# Altium PCB Drone_v1.0.PcbDoc
Units mm, origin at the board's own origin, x right, y up, seen from the top; angles counter-clockwise.
Board outline 99.06 x 99.27 mm, 2 copper layers (Top Layer, Bottom Layer); 78 components, 53 nets, 263 pads, 69 vias.
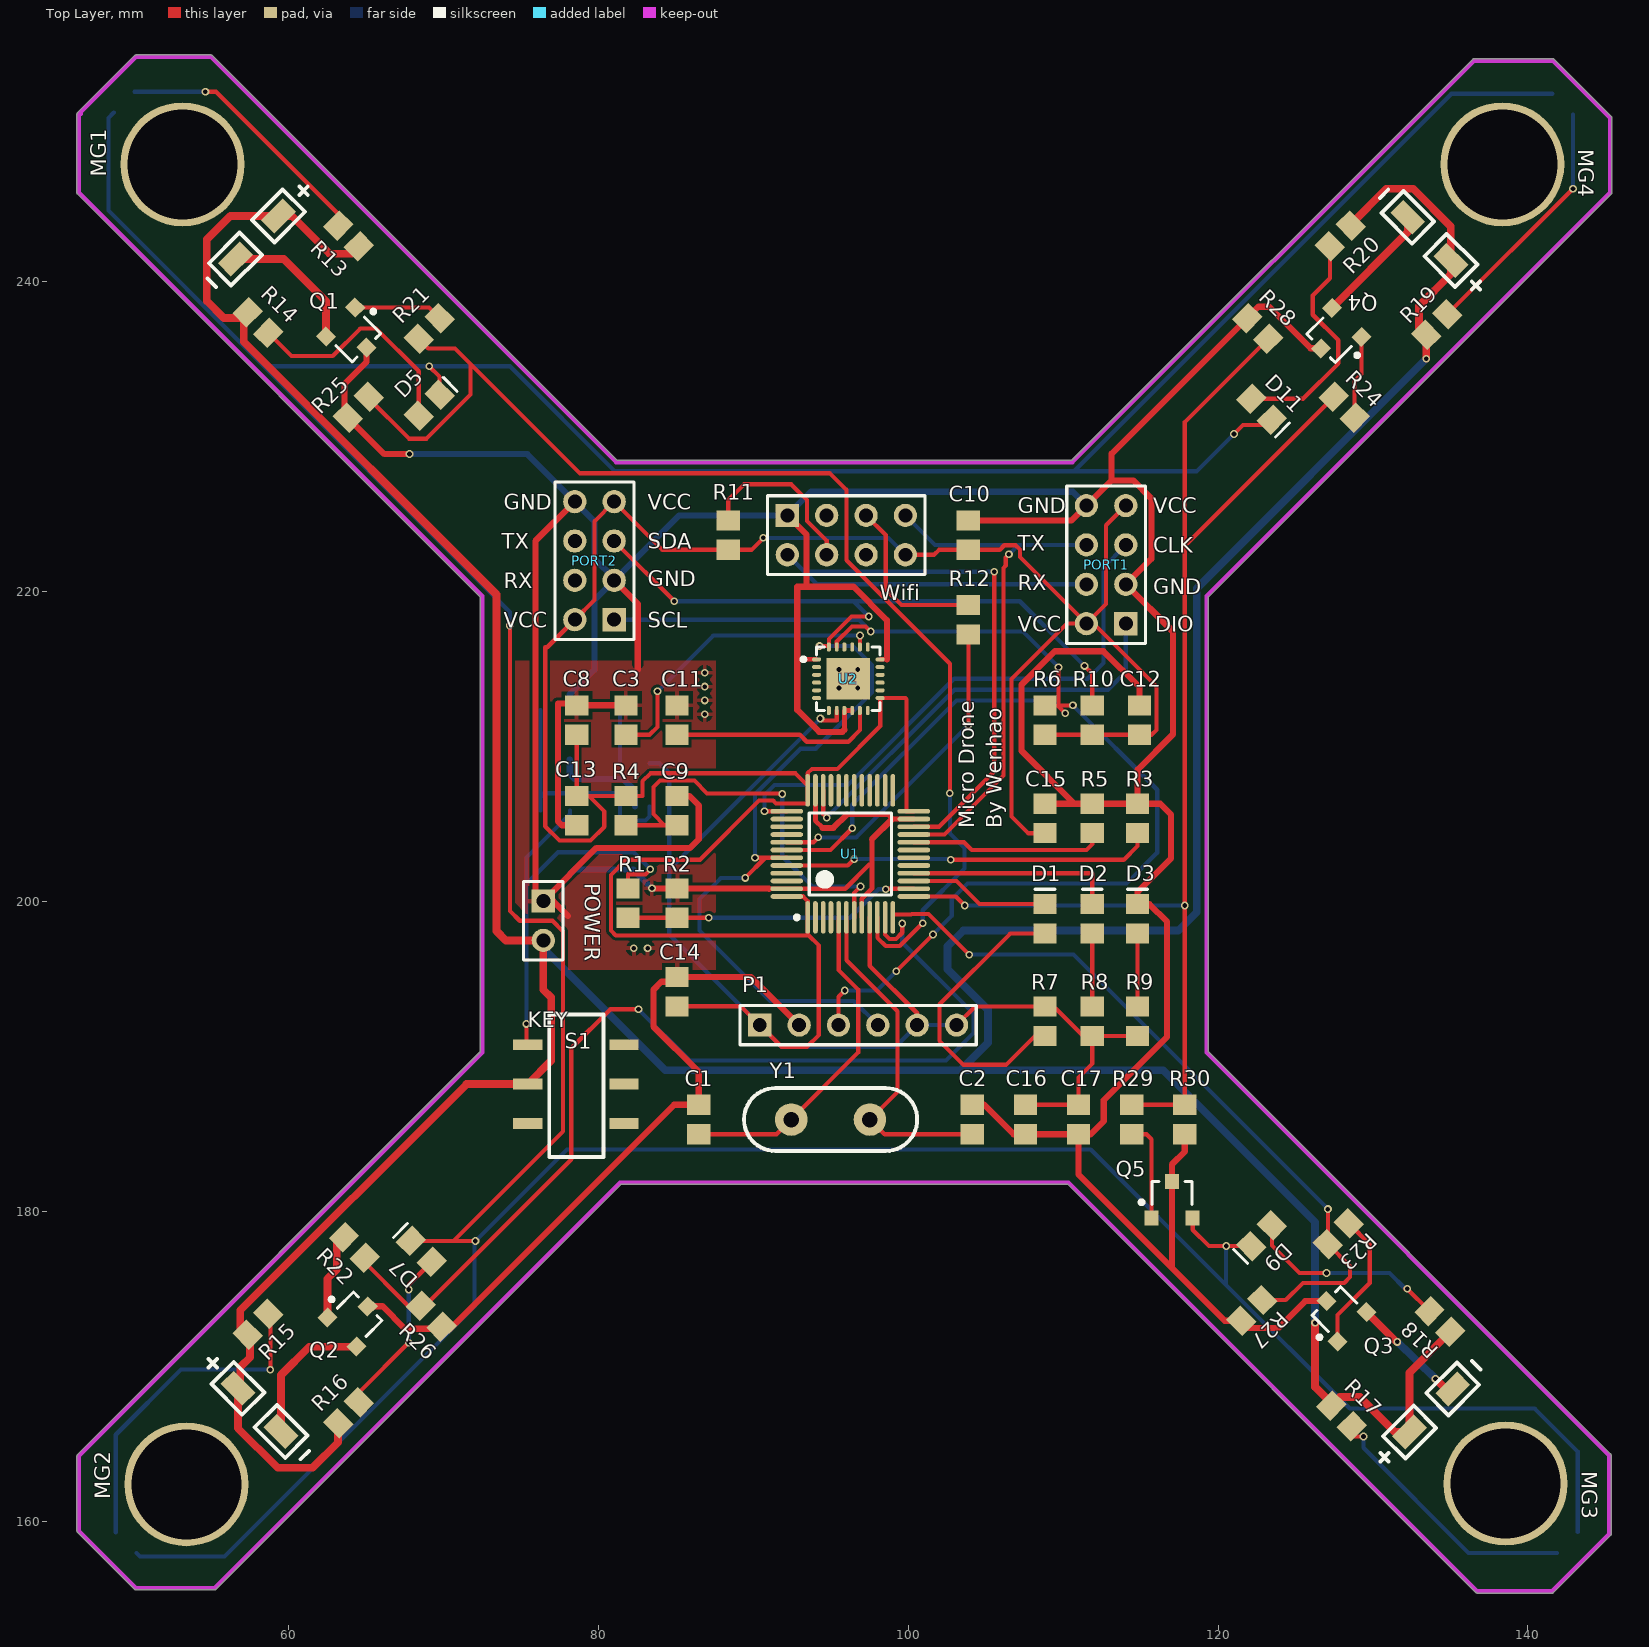
[diagram p0: Top Layer view]
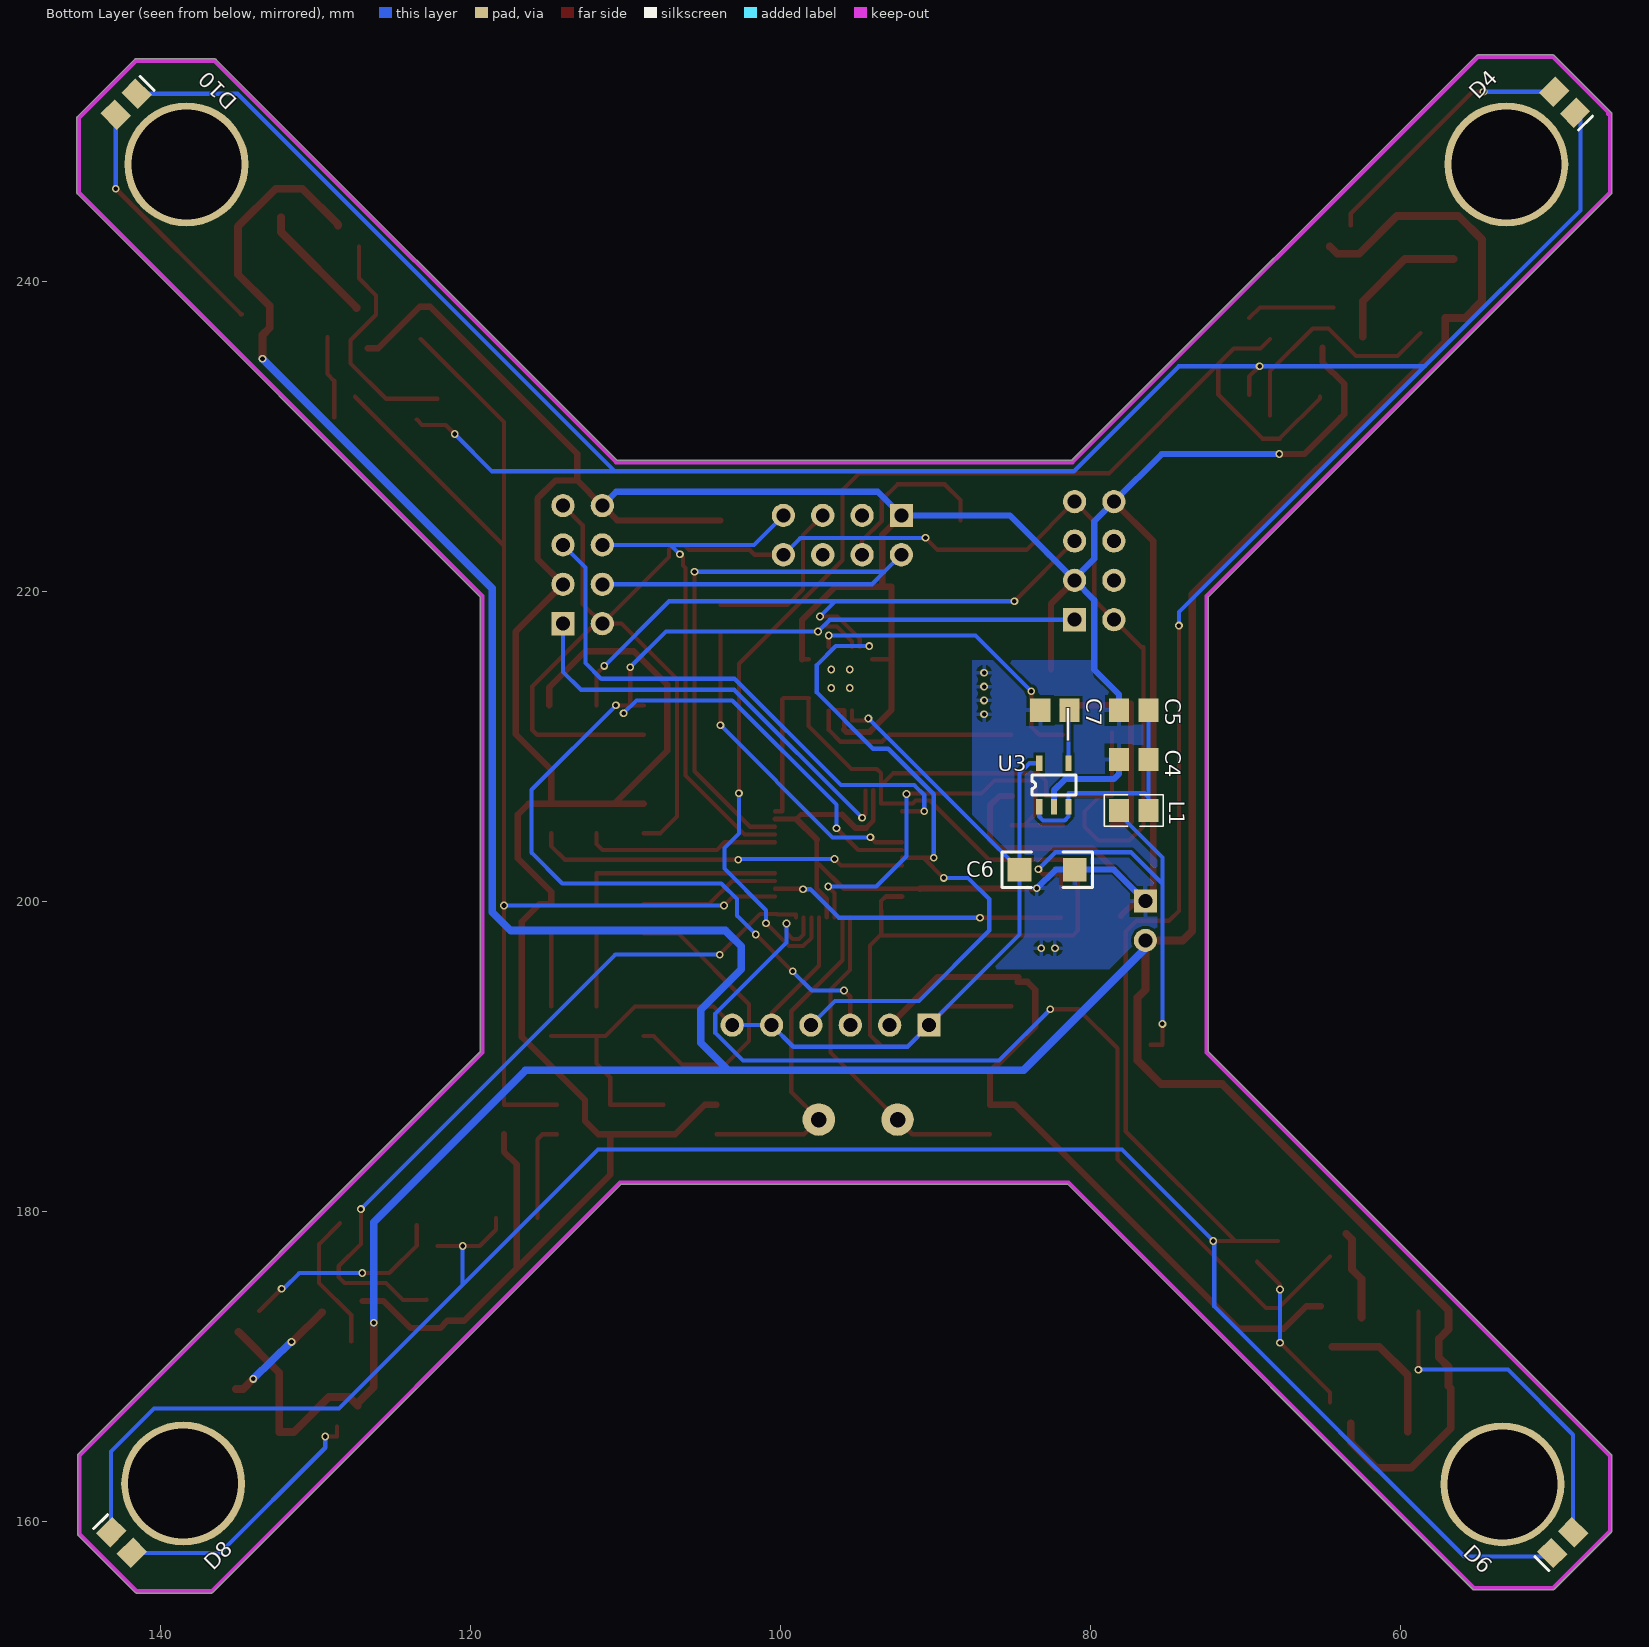
[diagram p1: Bottom Layer view, seen from below]

## Layer stack, top to bottom
Top Layer: signal copper 0.0356
Dielectric: dielectric 0.32, FR-4, Dk 4.8
Bottom Layer: signal copper 0.0356

## Board outline
50.075,155.612 46.392,159.295 46.392,159.294 cw(c46.482,159.385) 46.355,159.385 46.355,164.211 cw(c46.482,164.211) 46.392,164.302 46.392,164.301 72.39,190.299 72.39,219.657 46.392,245.655 46.392,245.654 cw(c46.482,245.745) 46.355,245.745 46.355,250.825 cw(c46.482,250.825) 46.392,250.916 46.392,250.915 50.075,254.598 50.074,254.598 cw(c50.165,254.508) 50.165,254.635 54.991,254.635 cw(c54.991,254.508) 55.082,254.598 55.081,254.598 81.206,228.473 110.564,228.473 136.435,254.344 136.434,254.344 cw(c136.525,254.254) 136.525,254.381 141.605,254.381 cw(c141.605,254.254) 141.696,254.344 141.695,254.344 145.378,250.661 145.378,250.662 cw(c145.288,250.571) 145.415,250.571 145.415,245.745 cw(c145.288,245.745) 145.378,245.654 145.378,245.655 119.38,219.657 119.38,190.299 145.332,164.347 145.331,164.348 cw(c145.242,164.257) 145.369,164.257 145.369,159.177 cw(c145.242,159.177) 145.331,159.087 145.332,159.087 141.649,155.404 141.649,155.405 cw(c141.559,155.494) 141.559,155.367 136.733,155.367 cw(c136.733,155.494) 136.635,155.413 cw(c136.716,155.512) 136.625,155.421 110.31,181.737 81.46,181.737 55.335,155.612 55.336,155.612 cw(c55.245,155.702) 55.245,155.575 50.165,155.575 cw(c50.165,155.702)

## Design rules (kind name [scope] priority, off if disabled: settings)
Clearance [All] p1: gap=0.2
PolygonConnect [All] p1: connectstyle=Relief reliefconductorwidth=0.254 reliefentries=4 polygonreliefangle="90 Angle" airgapwidth=0.254
RoutingVias [All] p1: holewidth=0.3 width=0.5 viastyle="Through Hole" minholewidth=0.3 minwidth=0.5 maxholewidth=0.3 maxwidth=0.5
SolderMaskExpansion [All] p1: expansion=0.102
Width [All] p1: maxlimit=0.5 minlimit=0.27 preferedwidth=0.27 minimp=50.000000 maximp=50.000000 favimp=50.000000
28 further rules are at their usual default settings.

## Components (designator, comment, footprint, x,y, rotation, side; value= is the part's Value field where it differs from the comment)
C1 "0402 12pF" 0805-2 86.487,185.928 r90 top
C2 "0402 12pF" 0805-2 104.14,185.928 r270 top
C3 "0402 12pF" 0805-2 81.788,211.709 r270 top
C4 "0402 12pF" 0805-2 77.216,209.169 r0 bottom
C5 "0402 12pF" 0805-2 77.216,212.344 r0 bottom
C6 "Cap Pol" 1206 82.804,202.057 r180 bottom
C7 "0402 12pF" 0805-2 82.296,212.344 r0 bottom
C8 "0402 12pF" 0805-2 78.613,211.709 r90 top
C9 "Cap" 0805-2 85.09,205.867 r90 top
C10 "0402 12pF" 0805-2 103.886,223.647 r90 top
C11 "0402 12pF" 0805-2 85.09,211.709 r90 top
C12 "Cap" 0805-2 114.935,211.709 r270 top
C13 "Cap" 0805-2 78.613,205.867 r90 top
C14 "Cap" 0805-2 85.09,194.183 r270 top
C15 "Cap" 0805-2 108.839,205.359 r270 top
C16 "0402 12pF" 0805-2 107.569,185.928 r270 top
C17 "0402 12pF" 0805-2 110.998,185.928 r270 top
D1 "LED0" LED_0805 108.839,198.882 r90 top
D2 "LED0" LED_0805 111.887,198.882 r90 top
D3 "LED0" LED_0805 114.808,198.882 r90 top
D4 "LED0" LED_0805 49.403,251.587 r225 bottom
D5 "LED0" LED_0805 69.088,232.029 r45 top
D6 "LED0" LED_0805 49.53,158.623 r315 bottom
D7 "LED0" LED_0805 68.58,177.419 r135 top
D8 "LED0" LED_0805 142.538,158.633 r45 bottom
D9 "LED0" LED_0805 122.809,178.435 r225 top
D10 "LED0" LED_0805 142.24,251.46 r135 bottom
D11 "LED0" LED_0805 122.809,231.775 r315 top
L1 "Inductor" 0805-1 77.216,205.867 r180 bottom
MG1 "MOTOR AC" Motor 53.975,246.761 r315 top
MG2 "MOTOR AC" Motor 54.229,163.195 r45 top
MG3 "MOTOR AC" Motor 137.749,163.241 r135 top
MG4 "MOTOR AC" Motor 137.541,246.761 r225 top
P1 "BMP280" HDR1X6 90.424,192.024 r0 top
PORT1 "PORT" HDR2X4_CEN 114.046,217.932 r90 top
PORT2 "PORT" HDR2X4_CEN 81.026,218.186 r90 top
POWER "Header 2" HDR1X2 76.454,200.025 r270 top (schematic designator POWER1)
Q1 "MOSN" PCBComponent_1#1 64.135,236.728 r225 top
Q2 "MOSN" PCBComponent_1#1 64.135,172.974 r315 top
Q3 "MOSN" PCBComponent_1#1 127.889,173.228 r45 top
Q4 "MOSN" PCBComponent_1#1 127.635,236.601 r135 top
Q5 "MOSN" PCBComponent_1#1 116.967,180.594 r0 top
R1 "Res1" 0805-2 81.915,199.898 r90 top
R2 "Res1" 0805-2 85.09,199.898 r90 top
R3 "Res1" 0805-2 114.808,205.359 r270 top
R4 "Res1" 0805-2 81.788,205.867 r90 top
R5 "Res1" 0805-2 111.887,205.359 r270 top
R6 "Res1" 0805-2 108.839,211.709 r90 top
R7 "Res1" 0805-2 108.839,192.278 r90 top
R8 "Res1" 0805-2 111.887,192.278 r270 top
R9 "Res1" 0805-2 114.808,192.278 r270 top
R10 "Res1" 0805-2 111.887,211.709 r90 top
R11 "Res1" 0805-2 88.392,223.647 r270 top
R12 "Res1" 0805-2 103.886,218.186 r90 top
R13 "Res1" 0805-2 63.881,242.951 r135 top
R14 "Res1" 0805-2 58.039,237.363 r315 top
R15 "Res1" 0805-2 58.039,172.72 r45 top
R16 "Res1" 0805-2 63.881,167.005 r45 top
R17 "Res1" 0805-2 127.97,166.797 r315 top
R18 "Res1" 0805-2 134.32,172.893 r135 top
R19 "Res1" 0805-2 134.112,237.236 r45 top
R20 "Res1" 0805-2 127.889,242.951 r225 top
R21 "Res1" 0805-2 69.088,236.982 r225 top
R22 "Res1" 0805-2 64.262,177.673 r315 top
R23 "Res1" 0805-2 127.762,178.562 r225 top
R24 "Res1" 0805-2 128.143,231.902 r135 top
R25 "Res1" 0805-2 64.516,231.902 r45 top
R26 "Res1" 0805-2 69.215,173.228 r135 top
R27 "Res1" 0805-2 122.174,173.609 r45 top
R28 "Res1" 0805-2 122.555,236.982 r315 top
R29 "Res1" 0805-2 114.427,185.928 r90 top
R30 "Res1" 0805-2 117.856,185.928 r90 top
S1 "Switch" 开关 76.835,183.515 r0 top
U1 "STM32F103C" LQFP-48_M 96.266,203.073 r90 top
U2 "MPU6050" QFN50P400X400X90-24N 96.139,214.376 r0 top
U3 "MIC5219" SOT25-5 83.312,206.121 r90 bottom
Wifi "ESP03" PCBComponent_1#2 92.202,222.377 r0 top (schematic designator Header1)
Y1 "Micro 3215" XTAL5 92.456,185.928 r0 top

## Footprints (in the part's own frame and the unit in brackets; to place one, negate y for a bottom-side part, rotate by r counter-clockwise, add the part's x,y. Pads: shape width x height; smd on the part's side, far side on the other; paste and mask are expansions set on the pad)
0805-1 [mm] "贴片带丝印"
  rect 1.3x1.5 smd: 1(-0.95,0) 2(0.95,0)
  silkscreen extent -1.91,-1.02 1.91,1.02, body extent -1.14,-0.51 1.14,0.51, height 1
0805-2 [mm] "贴片无丝印"
  rect 1.3x1.5 smd: 1(-0.95,0) 2(0.95,0)
1206 [mil] "贴片元件"
  rect 60x60 smd: 1(-70,0) 2(70,0)
  silkscreen extent -115,-45 115,45, body extent -75,-35 75,35, height 39
HDR1X2 [mm] "Connector; Header; 2 Position"
  rect 1.5x1.5 hole 0.9: 1(0,0)
  round 1.5 hole 0.9: 2(2.54,0)
  silkscreen extent -1.27,-1.27 3.81,1.27
HDR1X6 [mm] "Connector; Header; 6 Position"
  rect 1.5x1.5 hole 0.9: 1(0,0)
  round 1.5 hole 0.9: 2(2.54,0) 3(5.08,0) 4(7.62,0) 5(10.16,0) 6(12.7,0)
  silkscreen extent -1.27,-1.27 13.97,1.27
HDR2X4_CEN [mm] "Connector; Header; 4x2 Position"
  rect 1.5x1.5 hole 0.9: 1(0,0)
  round 1.5 hole 0.9: 2(2.54,0) 3(5.08,0) 4(7.62,0) 5(0,2.54) 6(2.54,2.54) 7(5.08,2.54) 8(7.62,2.54)
  silkscreen extent -1.27,-1.27 8.89,3.81
LED_0805 [mm] "贴片二极管"
  rect 1.3x1.5 smd: 1(-0.95,0) 2(0.95,0)
  silkscreen extent 1.91,-0.63 1.91,0.64
LQFP-48_M [mm] "Thin QFP, 48-Leads, Body 7x7mm, Pitch 0.5mm, IPC Low Density"
  oval 2.1x0.3 smd: 1(-4.1,2.75) 2(-4.1,2.25) 3(-4.1,1.75) 4(-4.1,1.25) 5(-4.1,0.75) 6(-4.1,0.25) 7(-4.1,-0.25) 8(-4.1,-0.75) 9(-4.1,-1.25) 10(-4.1,-1.75) 11(-4.1,-2.25) 12(-4.1,-2.75) 25(4.1,-2.75) 26(4.1,-2.25) 27(4.1,-1.75) 28(4.1,-1.25) 29(4.1,-0.75) 30(4.1,-0.25) 31(4.1,0.25) 32(4.1,0.75) 33(4.1,1.25) 34(4.1,1.75) 35(4.1,2.25) 36(4.1,2.75)
  oval 0.3x2.1 smd: 13(-2.75,-4.1) 14(-2.25,-4.1) 15(-1.75,-4.1) 16(-1.25,-4.1) 17(-0.75,-4.1) 18(-0.25,-4.1) 19(0.25,-4.1) 20(0.75,-4.1) 21(1.25,-4.1) 22(1.75,-4.1) 23(2.25,-4.1) 24(2.75,-4.1) 37(2.75,4.1) 38(2.25,4.1) 39(1.75,4.1) 40(1.25,4.1) 41(0.75,4.1) 42(0.25,4.1) 43(-0.25,4.1) 44(-0.75,4.1) 45(-1.25,4.1) 46(-1.75,4.1) 47(-2.25,4.1) 48(-2.75,4.1)
  silkscreen extent -4.22,-2.65 2.65,3.57, body extent -3.5,-3.5 3.5,3.5, height 1.6
Motor [mm]
  round 8 hole 7.1: 0(-1.143,0)
  rect 1.2x2 smd: 1(5.588,2.032) 2(5.588,-1.905)
  silkscreen extent 4.57,-4.06 6.6,4.7
PCBComponent_1#1 [mm]
  rect 0.9x0.95 smd: 1(-1.27,-1.016) 2(1.397,-1.016) 3(0.061,1.334)
  silkscreen extent -2.03,-0.14 1.36,1.33
PCBComponent_1#2 [mm]
  rect 1.5x1.5 hole 0.9: 1(0,2.54)
  round 1.5 hole 0.9: 2(2.54,2.54) 3(5.08,2.54) 4(7.62,2.54) 5(7.62,0) 6(5.08,0) 7(2.54,0) 8(0,0)
  silkscreen extent -1.27,-1.27 8.89,3.81
QFN50P400X400X90-24N [mm] "QFN, 24-Leads, Body 4.1x4.1mm (max), Pitch 0.50mm, IPC Medium Density"
  oval 0.6x0.25 smd: 1(-2.05,1.25) 2(-2.05,0.75) 3(-2.05,0.25) 4(-2.05,-0.25) 5(-2.05,-0.75) 6(-2.05,-1.25) 13(2.05,-1.25) 14(2.05,-0.75) 15(2.05,-0.25) 16(2.05,0.25) 17(2.05,0.75) 18(2.05,1.25)
  oval 0.25x0.6 smd: 7(-1.25,-2.05) 8(-0.75,-2.05) 9(-0.25,-2.05) 10(0.25,-2.05) 11(0.75,-2.05) 12(1.25,-2.05) 19(1.25,2.05) 20(0.75,2.05) 21(0.25,2.05) 22(-0.25,2.05) 23(-0.75,2.05) 24(-1.25,2.05)
  rect 2.8x2.7 smd: 25(0,0)
  silkscreen extent -3.02,-2.05 2.05,2.05, body extent -2.05,-2.05 2.05,2.05, height 0.9
SOT25-5 [mm]
  rect 1x0.4 smd: 1(0,0) 2(0,-0.95) 3(0,-1.9) 4(2.8,-1.9) 5(2.8,0)
  silkscreen extent 0.76,-2.38 2.03,0.48
XTAL5 [mm]
  round 2.1 hole 1: 1(0,0) 2(5.08,0)
  silkscreen extent -3.05,-2.03 8.13,2.03
开关 [mm]
  rect 1.9x0.7 smd: 1(-1.397,7.239) 2(-1.397,4.699) 3(-1.397,2.159) 4(4.826,7.239) 5(4.826,4.699) 6(4.826,2.159)
  silkscreen extent 0,0 3.5,9.2

## Part data
C1 C2 C3 C4 C5 C7 C8 C10 C11 C16 C17: library part Cap, "Capacitor"
C6: "极性电解电容"
C9 C12 C13 C14 C15: "无极性电容"
D1 D2 D3 D4 D5 D6 D7 D8 D9 D10 D11: "发光二极管"
L1: "电感"
P1: library part "Header 6", "Header, 6-Pin"
PORT1 PORT2: library part "Header 4X2A", "Header, 4-Pin, Dual row"
POWER: "Header, 2-Pin"
Q1 Q2 Q3 Q4 Q5: library part SI2302
R1 R2 R3 R4 R5 R6 R7 R8 R9 R10 R11 R12 R13 R14 R15 R16 R17 R18 R19 R20 R21 R22 R23 R24 R25 R26 R27 R28 R29 R30: "贴片电阻"
S1: library part 双刀双柄开关
U1: "STM32单片机48引脚"
Wifi: library part Hearder
Y1: library part XTAL, "Crystal Oscillator"

## Via types
v1: diameter 0.5, hole 0.3, Top Layer to Bottom Layer, 65 vias
v2: diameter 0.5, hole 0.3, Top Layer to Bottom Layer, tented top, 4 vias

## Nets (pads, with @x,y where several pads share a name; then routed paths per layer and width w, separated by ;. In a path a pad name is that pad's centre, name@x,y a point inside that pad or via, vN(x,y) a via of type N, cw(c..) or ccw(c..) an arc to the next point about the centre after c; other vN are vias at no path point)
3V3: C6.1 C8.1 C10.1 C12.2 C13.2 C14.2 C15.2 C16.1 C17.1 P1.1 P1.5 P1.6 PORT1.4 PORT1.5 PORT2.4 PORT2.5 R4.2 R6.1 R7.2 R8.2 R9.2 R10.1 R11.2 U1.1 U1.9 U1.24 U1.36 U1.48 U2.8 U2.13 U3.5 Wifi.5 | length 280.6
  Top Layer w0.27: 76.581,216.408 76.581,204.851 77.5,203.932 79.502,203.932 80.391,204.821 80.391,205.816 79.39,206.817 ; 76.708,216.408 PORT2.5 79.756,219.456 79.756,224.536 PORT2.4 84.135,222.697 R11.2 89.88,222.697 v1(90.653,223.469) ; C8.1@78.613,210.886 C13.2 79.39,206.817 ; C14.2 89.215,193.233 P1.1 91.821,190.627 93.472,190.627 94.234,191.389 94.234,197.169 93.588,197.815 93.516,197.815 U1.1 93.516,200.025 ; 93.218,200.323 93.516,200.025 ; v1(94.336,211.811) 94.455,211.691 95.389,211.691 U2.8 ; U1.9 97.516,195.854 100.584,192.786 P1.5 ; U2.13 U2.13@98.196,213.126 ; Wifi.5 101.676,222.377 101.996,222.697 C10.1 105.911,222.697 106.204,222.989 106.934,222.989 107.21,222.713 107.21,222.228 PORT1.5 ; U1.24 99.898,205.823 99.898,213.05 99.822,213.126 U2.13@98.196,213.126 ; P1.6 104.328,193.228 R7.2 109.398,193.228 111.298,191.328 R8.2 ; C16.1 C17.1 110.998,188.646 111.887,189.535 R8.2 ; C15.2 107.747,204.409 106.68,205.476 106.68,214.351 110.261,217.932 PORT1.5 ; R6.1 R10.1 113.386,210.759 C12.2 115.712,210.759 116.027,211.074 116.027,213.868 111.963,217.932 PORT1.5 ; PORT1.4 112.776,224.282 112.776,219.202 PORT1.5 ; R9.2 R8.2 ; 79.39,206.817 80.188,206.817 R4.2 82.865,206.817 82.865,207.766 83.371,208.272 92.738,208.272 U1.36@93.516,207.494 ; 93.516,200.025 93.509,198.973 93.502,197.815 81.128,197.815 80.823,198.12 80.823,201.719 81.796,202.692 86.563,202.692 90.379,206.508 91.289,206.508 91.473,206.324 93.516,206.324 U1.36 U1.36@93.516,207.494 ; U1.36@93.516,207.494 93.516,208.28 93.795,208.559 95.428,208.559 98.196,211.328 U2.13@98.196,213.126
  Top Layer w0.3: U1.48 93.218,200.323
  Bottom Layer w0.27: U3.5 83.941,208.921 84.582,208.28 C6.1 ; v1(90.653,223.469) 98.73,223.469 Wifi.5 ; v1(94.336,211.811) C6.1 ; P1.6 P1.5 99.187,190.627 91.821,190.627 P1.1 84.582,197.866 C6.1
BAT: MG1.1 MG2.1 MG3.1 MG4.1 POWER.2 R13.1 R14.1 R15.1 R16.1 R17.1 R18.1 R19.1 R20.1 S1.2 | length 290.8
  Top Layer w0.5: R16.1 63.209,165.1 61.558,163.449 59.309,163.449 56.743,166.015 MG2.1 56.896,168.736 56.896,169.954 57.531,170.589 57.531,171.756 56.896,172.391 56.896,173.609 71.501,188.214 S1.2 76.962,189.738 76.962,193.802 76.454,194.31 POWER.2 74.041,197.485 73.431,198.095 73.431,219.812 57.113,236.13 57.113,237.654 55.843,237.654 54.737,238.76 54.737,242.722 56.261,244.247 MG1.1 60.223,244.247 62.662,241.808 64.081,241.808 R13.1 ; v1(126.263,172.817) 126.263,168.67 127.298,167.635 R17.1 127.85,168.021 129.154,168.021 131.42,165.756 MG3.1 132.361,169.591 R18.1 ; R20.1 128.561,243.693 130.866,245.999 132.588,245.999 135.027,243.56 MG4.1 135.027,240.487 132.969,238.43 132.969,237.036 R19.1 v1(133.44,235.026)
  Bottom Layer w0.5: POWER.2 76.454,196.977 84.328,189.103 116.46,189.103 126.263,179.3 v1(126.263,172.817) ; 103.378,189.103 105.156,190.881 105.156,193.015 102.54,195.631 102.54,197.104 103.556,198.12 117.424,198.12 118.618,199.314 118.618,220.204 v1(133.44,235.026)
GND: C1.2 C2.1 C3.1 C4.2 C5.2 C6.2 C7.2 C8.2 C9.2 C10.2 C11.2 C12.1 C13.1 C14.1 C15.1 C16.2 C17.2 D3.2 P1.2 PORT1.2 PORT1.8 PORT2.2 PORT2.8 POWER.1 Q1.3 Q2.3 Q3.3 Q4.3 Q5.3 R2.2 R3.1 R5.1 R25.1 R26.1 R27.1 R28.1 R30.1 U1.8 U1.23 U1.35 U1.47 U2.1 U2.9 U2.10 U2.18 U3.2 Wifi.1 | length 408
  Top Layer w0.3: 91.012,200.823 U1.47 95.935,200.823 97.467,202.355 ; 92.857,215.626 U2.1 ; U1.35 94.016,205.221 94.488,204.749 ; 95.889,211.078 U2.9 U2.10 ; 96.038,205.613 98.692,205.613 98.982,205.323 U1.23 ; U1.8 97.016,200.165 97.663,200.812 97.663,204.004 ; U2.18 98.628,215.626
  Top Layer w0.4: Q1.3 65.035,234.809 63.627,233.401 63.627,231.448 R25.1 66.195,228.879 v1(67.818,228.879) ; Q2.3 66.08,173.874 67.525,172.429 70.448,172.429 84.897,186.878 C1.2 86.487,189.001 83.566,191.922 83.566,194.31 84.074,194.818 C14.1@84.709,194.818 ; 77.394,212.786 77.394,205.181 77.658,204.917 C13.1 ; 77.521,212.786 C8.2@78.613,212.786 ; 78.041,199.072 77.089,200.025 POWER.1 ; PORT2.8 75.946,223.266 75.946,200.533 POWER.1 ; C8.2 C3.1 ; PORT2.2 82.55,219.202 82.55,214.98 ; v1(83.464,200.848) R2.2 90.987,200.848 91.012,200.823 ; C14.1@84.643,195.133 C14.1 89.855,195.133 P1.2 ; C9.2 85.867,206.817 86.487,206.197 86.487,204.013 85.928,203.454 79.883,203.454 POWER.1 ; Wifi.1 93.447,223.672 93.447,220.313 ; 92.857,215.626 92.837,215.646 ; 94.488,204.749 95.174,204.749 96.038,205.613 ; 95.889,211.078 95.758,210.947 94.254,210.947 92.837,212.364 92.837,215.646 ; 97.663,204.004 98.982,205.323 ; 98.628,215.626 98.628,218.161 96.476,220.313 92.837,220.313 92.837,215.646 ; C10.2 110.551,224.597 PORT1.8 113.132,227.178 ; C2.1 104.902,186.878 106.802,184.978 C16.2 C17.2 ; C15.1 110.338,206.309 110.734,206.309 ; C12.1 114.935,213.817 112.598,216.154 109.474,216.154 107.315,213.995 107.315,209.728 110.734,206.309 ; 117.028,176.403 Q5.3 117.028,183.032 117.856,183.86 R30.1 ; Q4.3 125.97,235.701 123.292,238.379 122.609,238.379 R28.1 113.132,228.902 113.132,227.178 ; Q3.3 125.624,174.214 123.876,172.466 121.974,172.466 R27.1 120.433,172.937 110.998,182.372 C17.2 ; 110.734,206.309 R5.1 R3.1 ; C17.2 111.775,184.978 112.624,185.826 112.624,187.173 116.713,191.262 116.713,198.689 115.57,199.832 D3.2 114.808,200.635 116.967,202.794 116.967,205.613 116.271,206.309 R3.1 ; 113.132,227.178 114.529,227.178 115.697,226.009 115.697,222.123 PORT1.2 117.094,217.424 117.094,210.795 114.808,208.509 R3.1
  Bottom Layer w0.4: v1(67.818,228.879) 75.413,228.879 PORT2.8 79.756,224.536 79.756,222.123 81.026,220.853 PORT2.2 ; POWER.1 78.486,202.057 C6.2 82.255,202.057 v1(83.464,200.848) ; C4.2 78.166,208.219 78.486,207.899 81.625,207.899 82.362,207.162 U3.2 ; C5.2 78.166,213.36 79.756,214.95 79.756,219.456 PORT2.2 ; 82.804,222.504 82.677,222.377 ; PORT1.8 110.617,226.441 93.726,226.441 Wifi.1 85.217,224.917 82.677,222.377 ; PORT2.2 82.677,222.377
  other v1: 82.296,196.977 83.185,196.977 86.868,212.09 86.868,212.979 86.868,213.868 86.868,214.757
KEY: R12.1 U1.41 | length 20.7
  Top Layer w0.27: U1.41 93.89,203.823 v1(94.206,204.139) ; v1(103.886,211.378) R12.1
  Bottom Layer w0.27: v1(94.206,204.139) 96.647,204.139 v1(103.886,211.378)
LED1: D1.2 U1.15 | length 9.1
  Top Layer w0.27: U1.15 103.121,201.323 104.612,199.832 D1.2
LED2: D2.2 U1.16 | length 13.5
  Top Layer w0.27: U1.16 111.867,201.823 111.887,201.803 D2.2
LED_EN: U1.45
NetC3_2: C3.2 U2.20 | length 19.8
  Top Layer w0.27: C3.2 83.312,210.759 83.82,211.267 v1(83.82,213.563) ; U2.20 v1(96.889,217.17)
  Bottom Layer w0.27: v1(83.82,213.563) 87.427,217.17 v1(96.889,217.17)
NetC4_1: C4.1 C5.1 L1.2 U3.1 U3.3 | length 16
  Bottom Layer w0.27: L1.2 76.266,206.731 ; C5.1 C4.1 76.266,206.731 ; U3.1 83.312,205.486 83.058,205.232 81.666,205.232 81.412,205.486 U3.3 81.412,206.985 76.52,206.985 76.266,206.731
NetC7_1: C7.1 U3.4 | length 3.5
  Bottom Layer w0.27: C7.1 81.412,212.278 U3.4
NetC11_1: C11.1 U2.11 | length 13.6
  Top Layer w0.27: C11.1 93.008,210.759 93.455,210.312 96.139,210.312 96.889,211.062 U2.11
NetD1_1: D1.1 R7.1 | length 19.3
  Top Layer w0.27: R7.1 108.194,191.328 106.324,189.459 103.581,189.459 102.032,191.008 102.032,193.37 106.594,197.932 D1.1
NetD2_1: D2.1 R8.1 | length 4.7
  Top Layer w0.27: R8.1 D2.1
NetD3_1: D3.1 R9.1 | length 4.7
  Top Layer w0.27: R9.1 D3.1
NetD4_1: D4.1 R13.2 | length 17.2
  Top Layer w0.27: v1(54.644,252.259) 55.335,252.259 63.209,244.385 R13.2
  Bottom Layer w0.27: D4.1 v1(54.644,252.259)
NetD4_2: D4.2 D5.2 D6.2 D7.2 D8.2 D9.2 D10.2 D11.2 Q5.2 | length 332.9
  Top Layer w0.27: D7.2 70.649,178.091 ; v1(69.088,234.544) 69.76,233.872 D5.2 ; v1(72.071,178.091) 70.649,178.091 ; v1(74.295,217.805) 74.295,199.39 74.93,198.755 77.038,198.755 77.724,198.069 77.724,185.166 70.649,178.091 ; Q5.2 118.364,178.816 119.417,177.763 v1(120.523,177.763) D9.2 ; v1(121.031,230.175) 121.615,230.759 123.137,230.759 D11.2
  Bottom Layer w0.27: D4.2 48.387,250.571 48.387,244.591 58.434,234.544 ; D6.2 50.419,157.734 55.88,157.734 72.009,173.863 v1@72.009,178.091 ; v1(72.071,178.091) 77.978,183.998 111.785,183.998 120.523,175.26 ; v1(74.295,217.805) 74.289,217.811 74.289,218.688 58.434,234.544 ; v1(120.523,177.763) 120.523,175.26 ; v1(121.031,230.175) 118.618,227.762 110.686,227.762 ; D10.2 135.056,252.132 110.686,227.762 ; D8.2 143.21,164.511 140.437,167.284 128.499,167.284 120.523,175.26 ; 58.434,234.544 v1(69.088,234.544) 74.302,234.544 81.084,227.762 110.686,227.762
NetD5_1: D5.1 R14.2 | length 15.1
  Top Layer w0.27: R14.2 60.198,235.204 62.865,235.204 64.643,236.982 65.659,236.982 68.416,234.225 D5.1
NetD6_1: D6.1 R15.2 | length 21.7
  Top Layer w0.27: v1(58.838,169.785) R15.2@58.838,173.519
  Bottom Layer w0.27: D6.1 48.858,165.582 53.061,169.785 v1(58.838,169.785)
NetD7_1: D7.1 R16.2 | length 11
  Top Layer w0.27: R16.2 64.553,168.312 v1(67.767,171.526) ; v1(67.767,174.955) 67.767,175.263 D7.1
  Bottom Layer w0.27: v1(67.767,171.526) v1(67.767,174.955)
NetD8_1: D8.1 R17.2 | length 17.4
  Top Layer w0.27: R17.2 128.642,165.472 v1(129.388,165.472)
  Bottom Layer w0.27: v1(129.388,165.472) 129.388,164.744 136.171,157.961 D8.1
NetD9_1: D9.1 R18.2 | length 13.3
  Top Layer w0.27: D9.1 123.481,177.8 125.259,176.022 v1(127,176.022) v1@127.051,176.022 ; v1@132.08,175.006 v1(132.207,175.006) R18.2
  Bottom Layer w0.27: v1(127,176.022) 131.064,176.022 v1@132.08,175.006
NetD10_1: D10.1 R19.2 | length 16.3
  Top Layer w0.27: R19.2 134.784,237.896 134.849,237.896 134.849,237.938 v1(142.912,246.001)
  Bottom Layer w0.27: v1(142.912,246.001) D10.1
NetD11_1: D11.1 R20.2 | length 15.3
  Top Layer w0.27: D11.1 125.476,232.447 127.762,234.733 127.762,236.22 126.111,237.871 126.111,239.116 127.217,240.222 R20.2
NetHeader1_3: R12.2 Wifi.3 | length 11
  Top Layer w0.27: Wifi.3 98.552,223.647 98.552,220.152 99.568,219.136 R12.2
NetHeader1_7: R11.1 Wifi.7 | length 11.3
  Top Layer w0.27: R11.1 88.392,225.908 89.408,226.924 92.456,226.924 93.472,225.908 93.472,224.561 94.742,223.291 Wifi.7
NetMG1_2: MG1.2 Q1.2 | length 9.3
  Top Layer w0.5: MG1.2 59.708,241.463 62.429,238.742 Q1.2
NetMG2_2: MG2.2 Q2.2 | length 9.3
  Top Layer w0.5: MG2.2 59.527,169.436 61.359,171.268 Q2.2
NetMG3_2: MG3.2 Q3.2 | length 7.6
  Top Layer w0.5: Q3.2 131.445,171.648 v1(131.572,171.577) ; v1(134.036,169.189) 134.686,168.54 MG3.2
  Bottom Layer w0.5: v1(131.572,171.577) v1(134.036,169.189)
NetMG4_2: MG4.2 Q4.2 | length 7.9
  Top Layer w0.5: Q4.2 127.366,238.328 132.243,243.205 MG4.2
NetQ1_1: Q1.1 R21.1 | length 5.7
  Top Layer w0.27: Q1.1 69.069,238.344 R21.1
NetQ2_1: Q2.1 R22.1 | length 5.8
  Top Layer w0.5: Q2.1 62.519,175.641 63.119,176.241 63.119,178.181 R22.1@63.5,178.562
NetQ3_1: Q3.1 R23.1 | length 9
  Top Layer w0.27: Q3.1 127.709,173.302 129.794,175.387 129.794,177.873 R23.1
NetQ4_1: Q4.1 R24.1 | length 5.4
  Top Layer w0.27: R24.1 128.815,233.604 129.251,234.041 Q4.1
NetQ5_1: Q5.1 R29.1 | length 6.5
  Top Layer w0.27: R29.1 115.377,184.978 115.697,184.658 Q5.1
NetR1_1: R1.1 R2.1 U1.14 | length 19.2
  Top Layer w0.27: R1.1 R2.1 v1(87.137,198.948) ; v1@98.552,200.823 U1.14
  Bottom Layer w0.27: v1(87.137,198.948) 96.245,198.948 98.084,200.787 v1(98.552,200.787)
NetR3_2: R3.2 U1.44 | length 24
  Top Layer w0.27: U1.44 96.1,202.323 v1(96.52,202.743) ; v1(102.743,202.692) 113.919,202.692 114.808,203.581 R3.2
  Bottom Layer w0.27: v1(96.52,202.743) 102.692,202.743 v1(102.743,202.692)
NetR5_2: R5.2 U1.20 | length 12.6
  Top Layer w0.27: U1.20 103.607,203.823 104.103,203.327 111.506,203.327 111.887,203.708 R5.2
OSC1: C1.1 U1.5 Y1.1 | length 21.7
  Top Layer w0.27: C1.1 91.506,184.978 Y1.1 96.774,190.246 96.774,194.322 95.516,195.58 U1.5
OSC2: C2.2 U1.6 Y1.2 | length 22.1
  Top Layer w0.27: U1.6 96.016,196.211 99.314,192.913 99.314,187.706 Y1.2 98.486,184.978 C2.2
PWM1: R21.2 R25.2 U1.10 | length 79.9
  Top Layer w0.27: R25.2 65.188,232.475 67.793,229.87 68.91,229.87 71.755,232.715 71.755,234.696 ; R21.2 69.031,235.696 70.755,235.696 71.755,234.696 ; U1.10 98.016,197.654 98.552,197.118 99.455,197.118 v1(100.94,198.603) ; v1(102.692,206.985) 102.692,215.342 96.012,222.022 96.012,226.568 94.945,227.635 78.816,227.635 71.755,234.696
  Bottom Layer w0.27: v1(100.94,198.603) 100.94,199.435 103.632,202.128 103.632,203.454 102.692,204.394 v1(102.692,206.985)
PWM2: R22.2 R26.2 U1.11 | length 67.4
  Top Layer w0.27: R22.2@64.553,177.089 67.869,173.773 68.67,173.773 78.257,183.36 78.257,190.525 80.772,193.04 v1(82.601,193.04) ; U1.11 98.516,197.877 98.805,197.588 99.223,197.588 99.619,197.984 v1(99.619,198.577)
  Bottom Layer w0.27: v1(82.601,193.04) 85.903,189.738 102.438,189.738 104.216,191.516 104.216,192.761 99.619,197.358 v1(99.619,198.577)
PWM3: R23.2 R27.2 U1.12 | length 47.5
  Top Layer w0.27: U1.12 99.016,199.162 100.204,199.162 100.229,199.188 101.32,199.188 v1(103.937,196.571) ; R27.2@122.846,174.32 R27.2 124.37,174.281 125.476,175.387 128.143,175.387 128.524,175.768 128.524,176.457 R23.2 v1(127.09,180.148)
  Bottom Layer w0.27: v1(103.937,196.571) 110.668,196.571 v1(127.09,180.148)
PWM4: R24.2 R28.2 R29.2 R30.2 U1.13 | length 86.4
  Top Layer w0.27: U1.13 103.073,200.323 v1(103.651,199.746) ; R29.2 R30.2 v1(117.856,199.746) 117.856,222.958 ; R28.2 117.856,230.94 117.856,222.958 ; R24.2 117.856,222.958
  Bottom Layer w0.27: v1(103.651,199.746) v1(117.856,199.746)
RST: C9.1 R4.1 U1.7 | length 27
  Top Layer w0.27: R4.1 84.287,204.917 ; C9.1 84.287,204.917 ; v1(91.872,206.934) 91.828,206.978 87.027,206.978 86.203,207.802 83.977,207.802 83.566,207.391 83.566,205.638 84.287,204.917 ; U1.7 96.516,200.554 v1(96.926,200.965)
  Bottom Layer w0.27: v1(91.872,206.934) 91.872,202.921 93.828,200.965 v1(96.926,200.965)
SCL: P1.3 PORT2.1 R6.2 U1.42 U2.23 | length 100.4
  Top Layer w0.27: U1.42 94.992,203.323 v1(96.393,204.724) ; U2.23 95.389,216.776 96.368,217.755 97.256,217.755 v1(97.587,217.424) ; P1.3 95.504,193.853 v1(95.91,194.259) ; v1(99.224,195.49) v1(101.6,197.866) ; R6.2 109.632,212.659 ; v1(109.703,215.125) 109.703,212.659 ; v1(110.134,212.156) 109.632,212.659 ; v1(110.632,212.659) 109.703,212.659 ; 109.632,212.659 109.703,212.659
  Bottom Layer w0.27: PORT2.1 96.825,218.186 v1(97.587,217.424) ; v1(95.91,194.259) 97.993,194.259 v1(99.224,195.49) ; v1(96.393,204.724) 96.393,206.248 103.124,212.979 109.312,212.979 v1(110.134,212.156) ; 97.207,217.804 v1(97.587,217.424) ; v1(101.6,197.866) 102.819,199.085 102.819,200.152 103.835,201.168 114.097,201.168 116.078,203.149 116.078,207.213 v1(110.632,212.659) ; v1(109.703,215.125) 107.403,217.424 v1(97.587,217.424)
SDA: P1.4 PORT2.3 R10.2 U1.43 U2.24 | length 85.5
  Top Layer w0.27: PORT2.3 v1(84.912,219.38) ; v1(89.48,201.524) 90.78,202.823 ; v1(90.119,202.823) 90.78,202.823 ; U1.43 90.78,202.823 ; v1(94.285,216.484) U2.24@94.889,216.484 ; U2.24 U2.24@94.889,216.484 ; v1(97.46,218.389) 96.338,218.389 94.889,216.94 U2.24@94.889,216.484 ; v1(111.379,215.205) 111.887,214.697 R10.2
  Bottom Layer w0.27: v1(84.912,219.38) 107.205,219.38 v1(111.379,215.205) ; v1(89.48,201.524) 87.909,201.524 86.538,200.152 86.538,198.12 91.079,193.579 96.489,193.579 P1.4 ; v1(90.119,202.823) 90.119,206.922 93.052,209.855 94.031,209.855 97.663,213.487 97.663,215.265 96.444,216.484 v1(94.285,216.484) ; 96.52,219.329 v1(97.46,218.389)
SWCLK: PORT1.3 U1.37 | length 36.1
  Top Layer w0.27: v1(90.729,205.823) U1.37
  Bottom Layer w0.27: v1(90.729,205.823) 90.729,206.867 91.381,207.519 96.114,207.519 102.971,214.376 111.582,214.376 112.598,215.392 112.598,221.564 PORT1.3
SWDIO: PORT1.1 U1.34 | length 28.2
  Top Layer w0.27: U1.34 94.516,205.636 v1(94.742,205.41)
  Bottom Layer w0.27: v1(94.742,205.41) 102.998,213.666 112.891,213.666 114.046,214.821 PORT1.1
USART1_RX: PORT2.6
USART1_TX: PORT2.7
USART3_RX: PORT1.6 U1.22 Wifi.8 | length 51.9
  Top Layer w0.27: U1.22 101.981,204.823 105.562,208.404 v1(105.562,221.285)
  Bottom Layer w0.27: Wifi.8 93.294,221.285 ; v1(105.562,221.285) 93.294,221.285 ; PORT1.6 94.107,220.472 93.294,221.285
USART3_TX: PORT1.7 U1.21 Wifi.4 | length 35.1
  Top Layer w0.27: U1.21 102.342,204.323 106.147,208.128 106.147,221.527 106.299,221.679 106.299,222.199 v1(106.502,222.402)
  Bottom Layer w0.27: Wifi.4 101.727,223.012 107.112,223.012 ; v1(106.502,222.402) 107.112,223.012 ; PORT1.7 107.112,223.012
VCC: L1.1 R1.2 S1.1 | length 28.8
  Top Layer w0.27: v1(75.362,192.1) 75.362,190.754 S1.1 S1.1@76.124,190.754 ; R1.2 81.915,201.752 83.058,201.752 83.363,202.057 v1(83.363,202.082)
  Bottom Layer w0.27: v1(75.362,192.1) 75.362,192.862 75.362,201.143 ; L1.1 78.166,205.649 75.362,202.844 75.362,201.143 ; v1(83.363,202.082) 82.271,203.175 77.394,203.175 75.362,201.143
pads on no net: MG1.0 MG2.0 MG3.0 MG4.0 S1.3 S1.4 S1.5 S1.6 U1.2 U1.3 U1.4 U1.17 U1.18 U1.19 U1.25 U1.26 U1.27 U1.28 U1.29 U1.30 U1.31 U1.32 U1.33 U1.38 U1.39 U1.40 U1.46 U2.2 U2.3 U2.4 U2.5 U2.6 U2.7 U2.12 U2.14 U2.15 U2.16 U2.17 U2.19 U2.21 U2.22 U2.25 Wifi.2 Wifi.6
copper on no net:
  other v2: 95.539,213.776 96.739,213.776 95.539,214.976 96.739,214.976

## Polygon pours and split planes (outlines as drawn)
GND on Bottom Layer "Bottom Layer-No Net" (solid, remove dead copper, pour order 2): 73.91,215.577 87.626,215.577 87.626,195.765 87.499,195.638 73.91,195.638 73.91,215.577
GND on Top Layer "Bottom Layer-No Net" (solid, remove dead copper, pour order 4): 87.573,215.543 87.573,195.604 74.238,195.604 74.238,215.543 87.573,215.543

## Keep-outs
Keep-Out Layer:
  lines w0.254: 46.609,250.825 46.482,250.825 ; 136.716,155.512 110.363,181.864 81.407,181.864 55.245,155.702 50.165,155.702 46.482,159.385 46.482,164.211 72.517,190.246 72.517,219.71 46.482,245.745 46.482,250.825 ; 136.733,155.494 141.559,155.494 145.242,159.177 145.242,164.257 119.253,190.246 119.253,219.71 145.288,245.745 145.288,250.571 141.605,254.254 136.525,254.254 110.617,228.346 81.153,228.346 54.991,254.508 50.165,254.508 46.482,250.825

## Silkscreen, mask and mechanical layers (free items; w line width, h text height)
Top Overlay:
  text "GND" at 73.914,225.298 h1
  text "VCC" at 83.185,225.298 h1
  text "GND" at 107.061,225.044 h1
  text "VCC" at 115.824,225.044 h1
  text "TX" at 73.787,222.758 h1
  text "SDA" at 83.185,222.758 h1
  text "TX" at 107.061,222.631 h1
  text "CLK" at 115.824,222.504 h1
  text "GND" at 83.185,220.345 h1
  text "RX" at 73.914,220.218 h1
  text "RX" at 107.061,220.091 h1
  text "GND" at 115.824,219.837 h1
  text "VCC" at 73.914,217.678 h1
  text "SCL" at 83.185,217.678 h1
  text "VCC" at 107.061,217.424 h1
  text "DIO" at 115.951,217.424 h1
  text "Micro Drone" at 104.267,204.724 h1 r90
  text "By Wenhao" at 106.045,204.724 h1 r90
Bottom Overlay:
  text "|" at 81.788,211.963 h1.52 r180

## Text inside footprints (layer, text, board x,y; h text height)
S1: Top Overlay "KEY" at 75.438,191.897 h1